# EAGLE board Schematics (EAGLE 9.2.2)
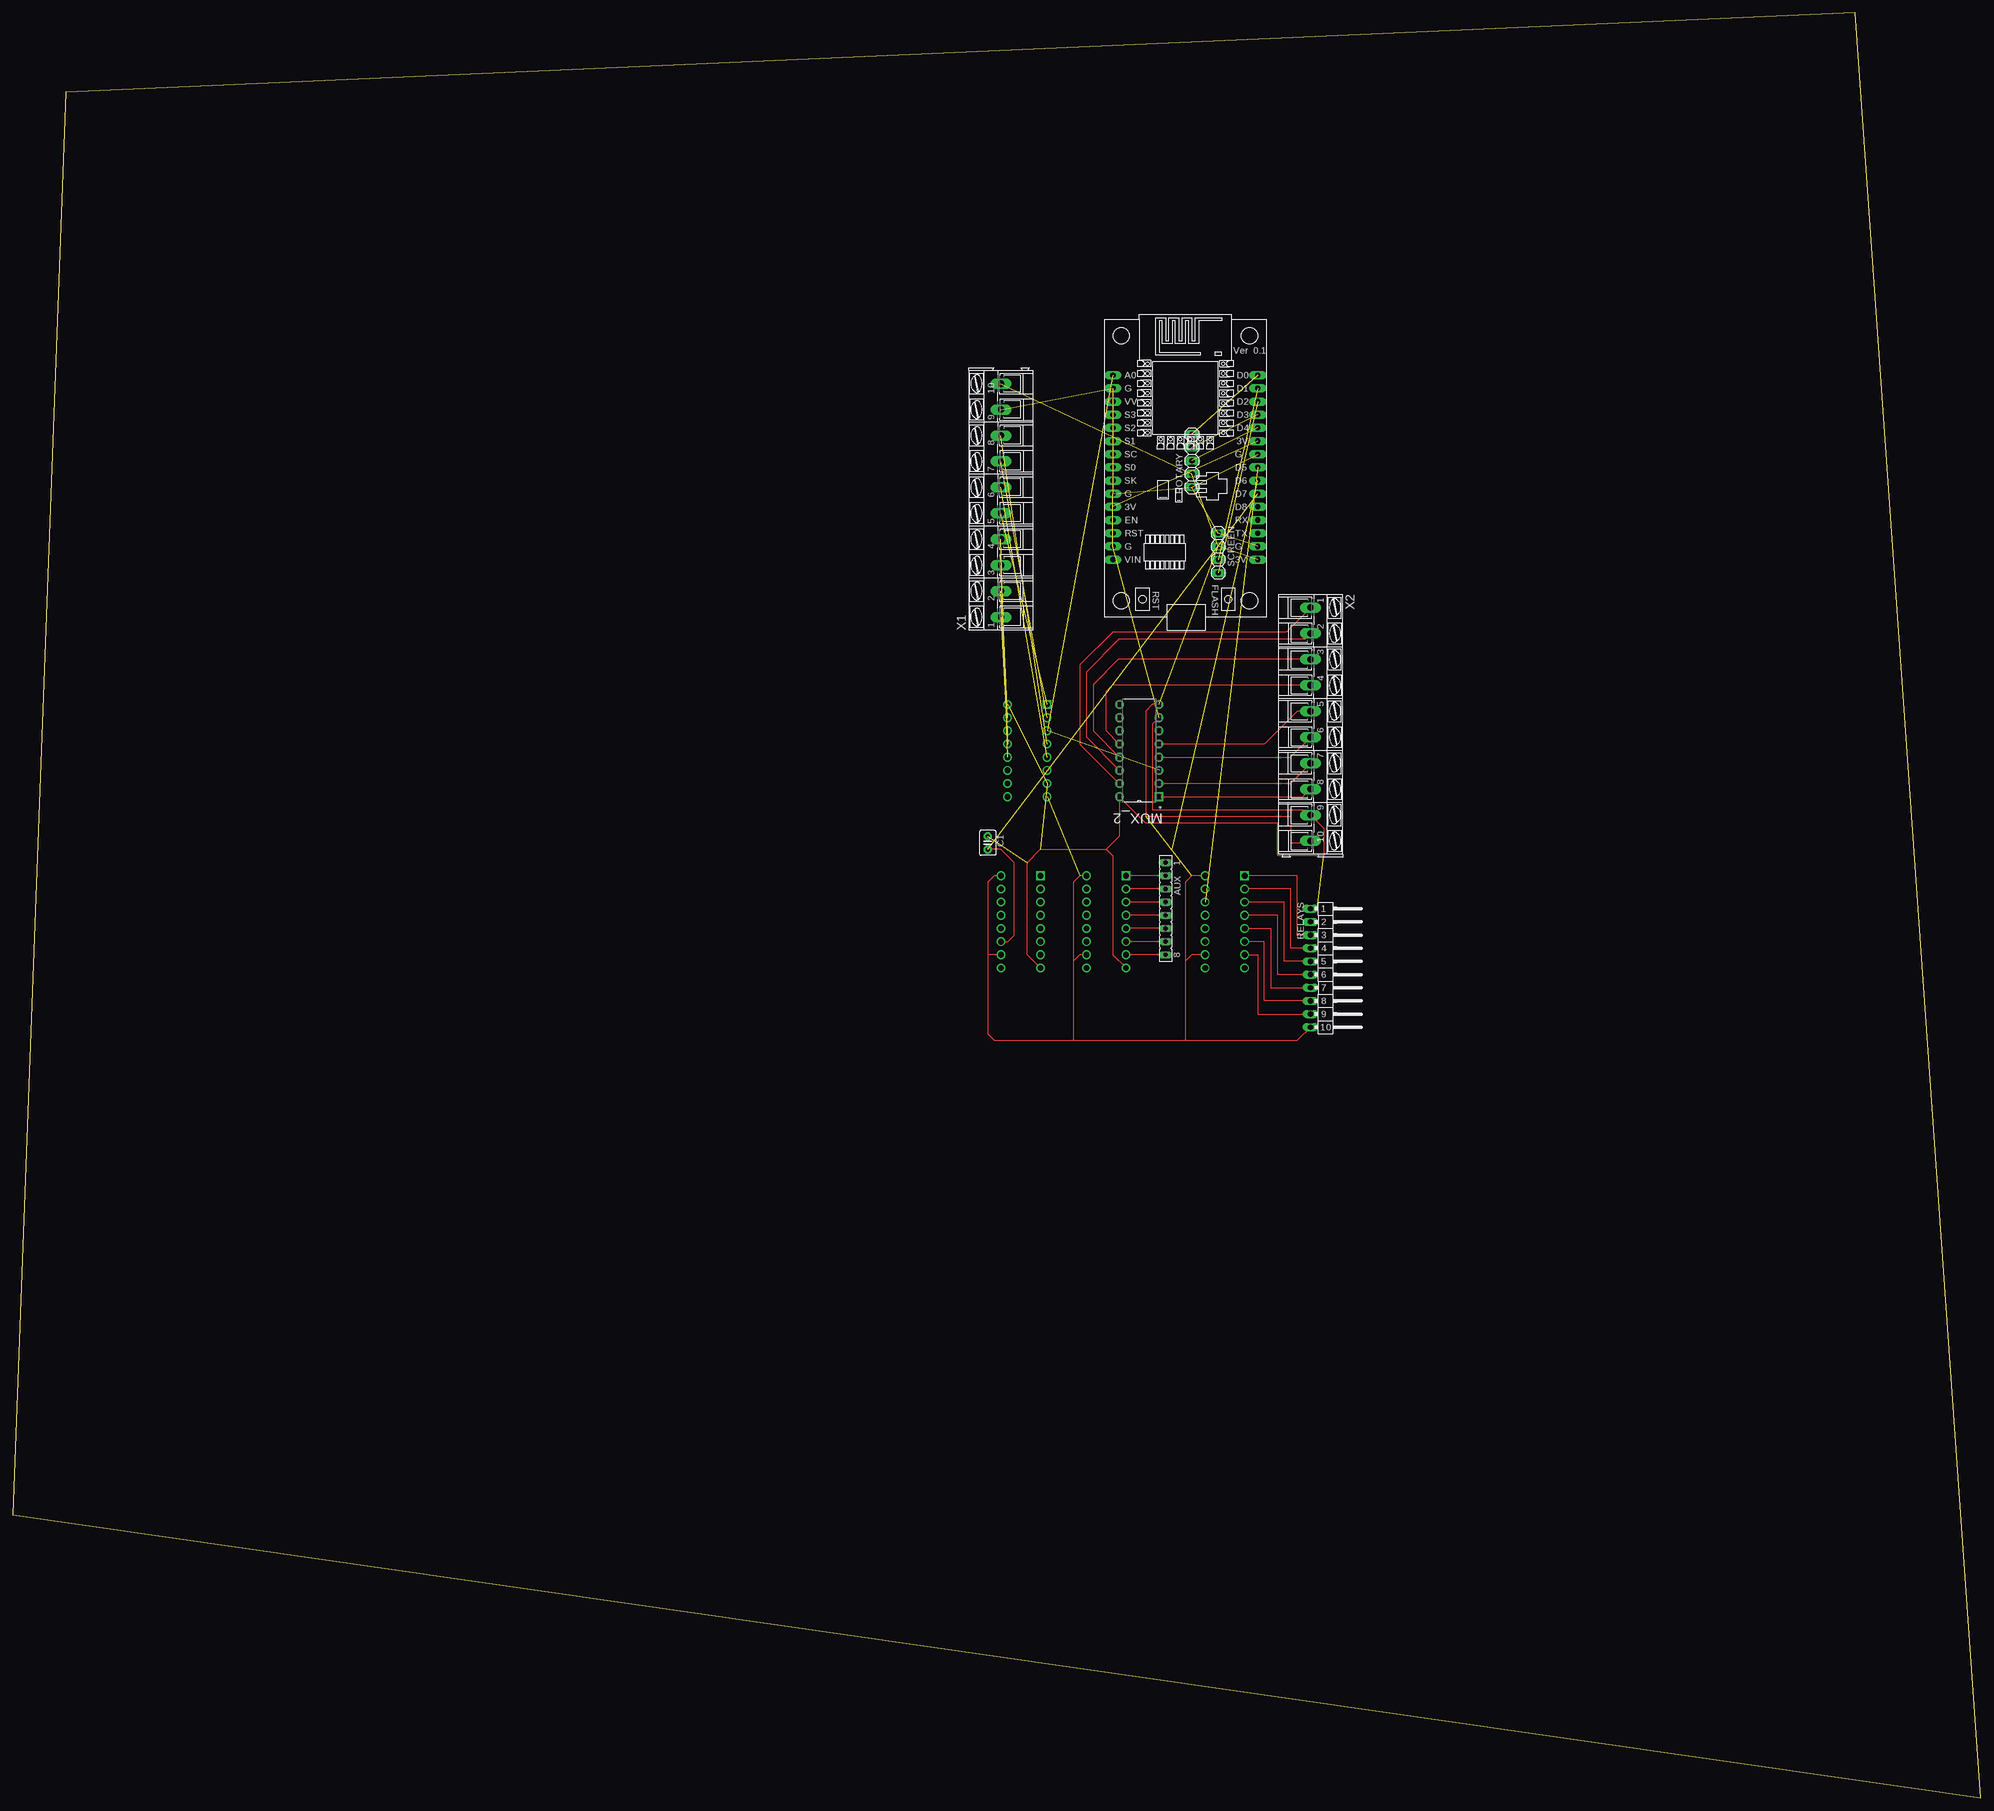
[diagram p0: board, top side]
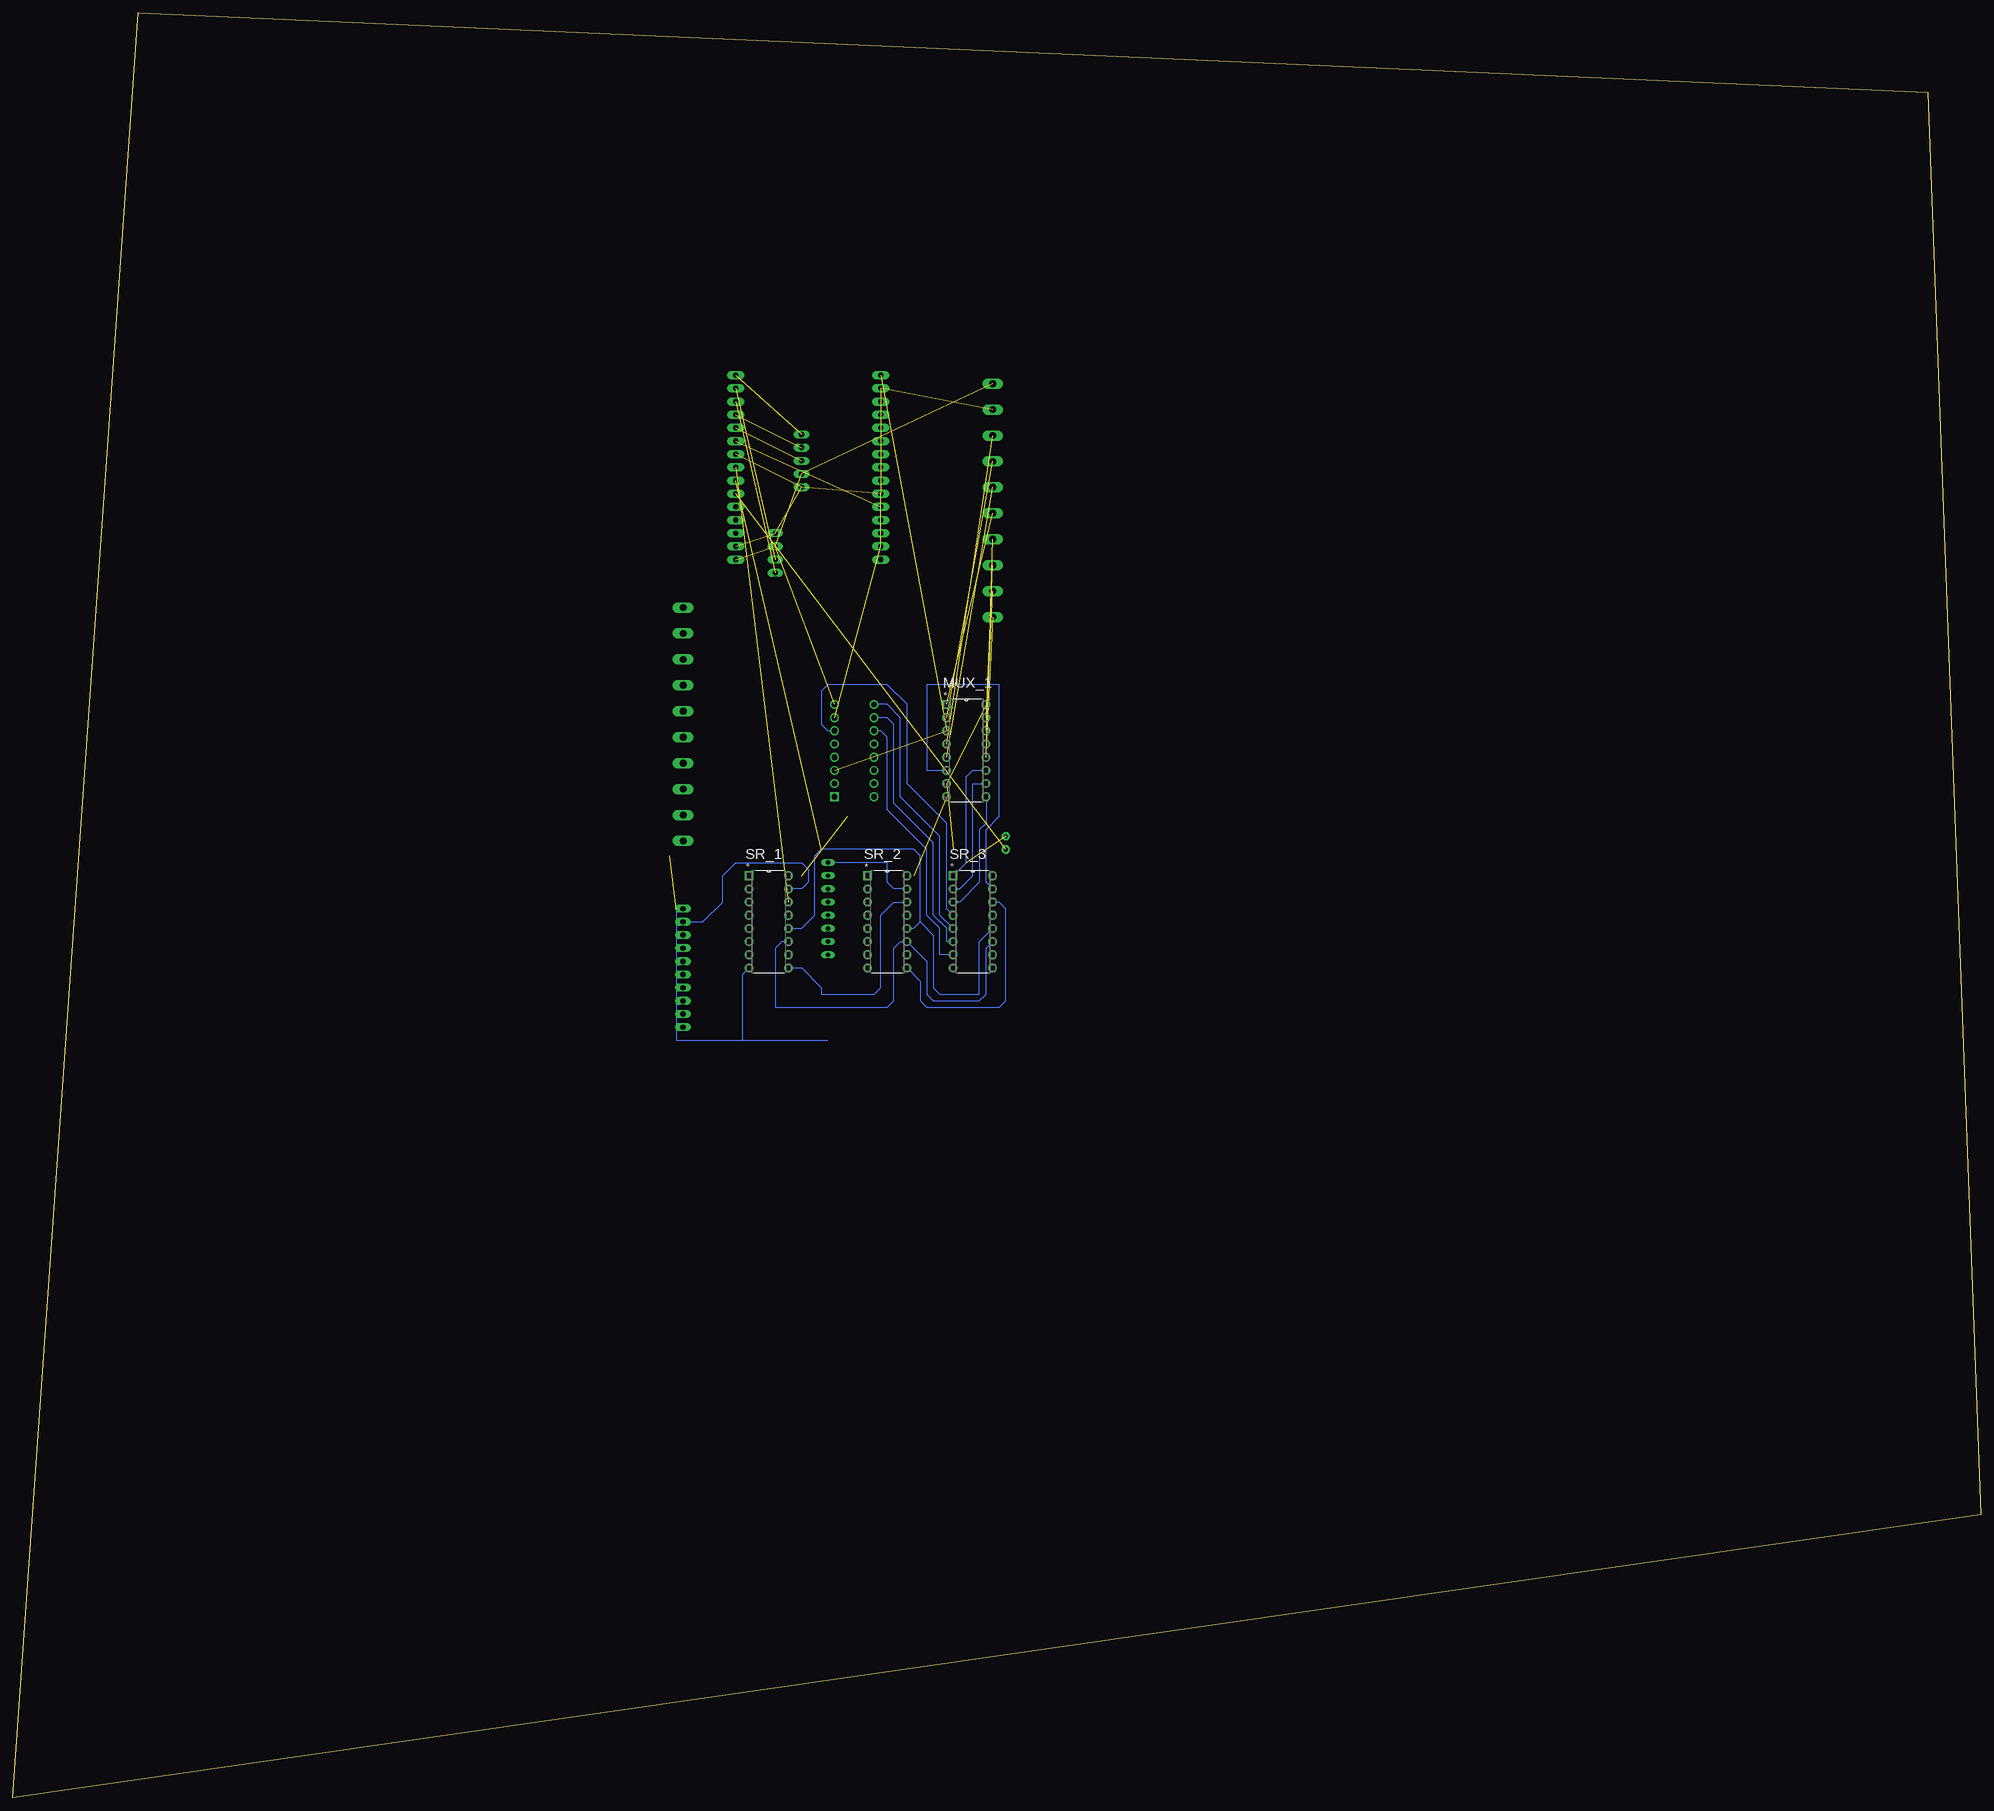
[diagram p1: board, bottom side, seen from below]

Size 379.4 x 344.16 mm. Coordinates in mm from the lower left corner, seen from the top.
Outline: 0,54.61 379.4,0 355.27,344.16 10.16,328.92 0,54.61
Copper layers (1*16): Top 0.035mm / dielectric 1.5mm / Bottom 0.035mm
Design rules "default": minimum track width 6mil, minimum drill 0.35mm, track to track 6mil, track to pad 6mil, pad to pad 6mil, via to via 6mil, smd to smd 6mil, copper to edge 40mil, drill to drill 6mil, minimum pad ring 10mil, minimum via ring 8mil, stop-mask expansion 4mil, vias tented up to drill 0mil, thermal gap 10mil

## Footprints (pad centres in the part's own frame; a part is rotated, then mirrored left to right if it is on the bottom)
FE08 = drill 0.813 long: 1 -8.89,0; 2 -6.35,0; 3 -3.81,0; 4 -1.27,0; 5 1.27,0; 6 3.81,0; 7 6.35,0; 8 8.89,0
C2.5-3 = drill 0.813 pad 1.6 octagon: 1 -1.27,0; 2 1.27,0
DIP254P762X508-16 = drill 1.118 square: 1 -7.62,17.78 | drill 1.118: 2 -7.62,15.24; 3 -7.62,12.7; 4 -7.62,10.16; 5 -7.62,7.62; 6 -7.62,5.08; 7 -7.62,2.54; 8 -7.62,0; 9 0,0; 10 0,2.54; 11 0,5.08; 12 0,7.62; 13 0,10.16; 14 0,12.7; 15 0,15.24; 16 0,17.78
MA10-1W = drill 1.016 long: 1 -11.43,0; 2 -8.89,0; 3 -6.35,0; 4 -3.81,0; 5 -1.27,0; 6 1.27,0; 7 3.81,0; 8 6.35,0; 9 8.89,0; 10 11.43,0
1X05 = drill 1.016 long: 1 -5.08,0; 2 -2.54,0; 3 0,0; 4 2.54,0; 5 5.08,0
1X04 = drill 1.016 long: 1 -3.81,0; 2 -1.27,0; 3 1.27,0; 4 3.81,0
NODEMCU = drill 1 pad 1.676 long: 1 -13.97,17.78; 2 -13.97,15.24; 3 -13.97,12.7; 4 -13.97,10.16; 5 -13.97,7.62; 6 -13.97,5.08; 7 -13.97,2.54; 8 -13.97,0; 9 -13.97,-2.54; 10 -13.97,-5.08; 11 -13.97,-7.62; 12 -13.97,-10.16; 13 -13.97,-12.7; 14 -13.97,-15.24; 15 -13.97,-17.78; 16 13.97,-17.78; 17 13.97,-15.24; 18 13.97,-12.7; 19 13.97,-10.16; 20 13.97,-7.62; 21 13.97,-5.08; 22 13.97,-2.54; 23 13.97,0; 24 13.97,2.54; 25 13.97,5.08; 26 13.97,7.62; 27 13.97,10.16; 28 13.97,12.7; 29 13.97,15.24; 30 13.97,17.78
AK300/10 = drill 1.321 long: 1 -22.504,0; 2 -17.501,0; 3 -12.497,0; 4 -7.493,0; 5 -2.515,0; 6 2.489,0; 7 7.493,0; 8 12.497,0; 9 17.501,0; 10 22.504,0

## Placement (x,y rotation side)
AUX  [FE08]  222.25,171.45 270 top
C1  10µF  [C2.5-3]  187.96,184.15 270 top
MUX_1  CD4051BE  [DIP254P762X508-16]  191.77,193.04 0 bottom
MUX_2  CD4051BE  [DIP254P762X508-16]  213.36,210.82 180 top
RELAYS  [MA10-1W]  250.19,160.02 270 top
ROTARY  [1X05]  227.33,257.81 90 top
SCREEN  [1X04]  232.41,240.03 270 top
SR_1  SN74HC595N  [DIP254P762X508-16]  229.87,160.02 0 bottom
SR_2  SN74HC595N  [DIP254P762X508-16]  207.01,160.02 0 bottom
SR_3  SN74HC595N  [DIP254P762X508-16]  190.5,160.02 0 bottom
U$1  NODEMCU  [NODEMCU]  226.06,256.54 0 top
X1  Boutons  [AK300/10]  190.5,250.19 90 top
X2  Potentiometres  [AK300/10]  250.19,207.01 270 top

## Library data of the parts
AUX = con-lsta; OC_FARNELL: unknown; OC_NEWARK: unknown
C1 = capacitor-wima
MUX_1 MUX_2 = CD4051BEE4; MPN: CD4051BE; OC_FARNELL: 2135100; OC_NEWARK: 60K5119; PACKAGE: PDIP-16; SUPPLIER: Texas Instruments
RELAYS = con-lstb; OC_FARNELL: unknown; OC_NEWARK: unknown
ROTARY SCREEN = pinhead
SR_1-SR_3 = 74hc595; MPN: SN74HC595N; OC_FARNELL: 9591664; OC_NEWARK: 60K6845; PACKAGE: PDIP-16; SUPPLIER: Texas Instruments
U$1 = nodemcu
X1 X2 = con-ptr500; OC_FARNELL: unknown; OC_NEWARK: unknown

## Nets
3V: U$1.11 U$1.25
GND: C1.1 MUX_1.7 MUX_1.16 MUX_2.7 MUX_2.16 RELAYS.1 ROTARY.1 SCREEN.1 SR_1.8 SR_2.8 SR_3.8 U$1.2 U$1.10 U$1.14 U$1.17 U$1.24 X1.9 X2.9
N$1: RELAYS.2 SR_1.15
N$2: SR_1.14 U$1.23
N$3: SR_1.12 SR_2.12 SR_3.12 U$1.22
N$4: SR_2.9 SR_3.14
N$5: C1.2 SR_1.11 SR_2.11 SR_3.11 U$1.21
N$6: RELAYS.3 SR_1.1
N$7: RELAYS.4 SR_1.2
N$8: RELAYS.5 SR_1.3
N$9: RELAYS.6 SR_1.4
N$10: RELAYS.7 SR_1.5
N$11: RELAYS.8 SR_1.6
N$12: RELAYS.9 SR_1.7
N$13: MUX_1.13 X1.1
N$14: MUX_1.14 X1.2
N$15: SR_1.9 SR_2.14
N$16: MUX_1.15 X1.3
N$17: MUX_1.12 X1.4
N$18: MUX_1.1 X1.5
N$19: MUX_1.5 X1.6
N$20: MUX_1.2 X1.7
N$21: MUX_1.4 X1.8
N$22: MUX_2.1 X2.8
N$23: MUX_2.2 X2.7
N$24: MUX_1.6 SR_3.15
N$25: MUX_1.11 SR_3.1
N$26: MUX_1.10 SR_3.2
N$27: MUX_1.9 SR_3.3
N$28: MUX_2.6 SR_3.4
N$29: MUX_2.9 SR_3.5
N$30: MUX_2.10 SR_3.6
N$31: MUX_2.11 SR_3.7
N$32: MUX_1.3 MUX_2.3 U$1.1
N$33: MUX_2.4 X2.6
N$34: MUX_2.5 X2.5
N$35: MUX_2.12 X2.4
N$36: MUX_2.15 X2.1
N$37: MUX_2.14 X2.2
N$38: MUX_2.13 X2.3
N$39: AUX.1 SR_2.15
N$40: AUX.2 SR_2.1
N$41: AUX.3 SR_2.2
N$42: AUX.4 SR_2.3
N$43: AUX.5 SR_2.4
N$44: AUX.6 SR_2.5
N$45: AUX.7 SR_2.6
N$46: AUX.8 SR_2.7
N$48: ROTARY.3 U$1.26
N$49: ROTARY.5 U$1.30
N$50: ROTARY.4 U$1.27
N$51: SCREEN.4 U$1.28
N$52: SCREEN.3 U$1.29
VCC: MUX_1.8 MUX_2.8 RELAYS.10 ROTARY.2 SCREEN.2 SR_1.10 SR_1.16 SR_2.10 SR_2.16 SR_3.10 SR_3.16 U$1.16 X1.10 X2.10

## Tracks (layer width: path | path; a pad name or v marks a point on that pad's centre or on a via)
3V  (1 unrouted)
GND  (12 unrouted)
  Top 0.152: SR_3.8 195.58,162.56 195.58,180.34 198.12,182.88 210.82,182.88 | 210.82,182.88 212.09,181.61 212.09,162.56 SR_2.8 | MUX_2.7 219.71,207.01 219.71,190.5 249.2,190.5 X2.9 252.73,186.97 252.73,181.61 243.84,181.61 243.84,187.96 218.44,187.96 MUX_2.16 213.36,185.42 210.82,182.88
  Bottom 0.152: 238.76,146.05 222.25,146.05 | SR_1.8 238.76,158.75 238.76,146.05 | RELAYS.1 251.46,171.45 251.46,146.05 238.76,146.05
N$1
  Bottom 0.152: RELAYS.2 246.38,168.91 242.57,172.72 242.57,177.8 240.03,180.34 227.33,180.34 226.06,179.07 226.06,176.53 227.33,175.26 SR_1.15
N$2  (1 unrouted)
N$3  (1 unrouted)
  Bottom 0.152: SR_1.12 227.33,167.64 224.79,170.18 224.79,181.61 223.52,182.88 205.74,182.88 204.47,181.61 204.47,168.91 | SR_2.12 205.74,167.64 204.47,168.91 | 204.47,168.91 201.93,166.37 201.93,156.21 200.66,154.94 193.04,154.94 193.04,165.1 SR_3.12
N$4
  Bottom 0.152: SR_2.9 204.47,157.48 204.47,153.67 203.2,152.4 189.23,152.4 187.96,153.67 187.96,171.45 189.23,172.72 SR_3.14
N$5  (1 unrouted)
  Top 0.152: SR_3.11 191.77,165.1 193.04,166.37 193.04,180.34 190.5,182.88 C1.2
  Bottom 0.152: SR_1.11 231.14,165.1 232.41,163.83 232.41,152.4 210.82,152.4 209.55,153.67 209.55,163.83 208.28,165.1 SR_2.11 203.2,161.29 203.2,154.94 201.93,153.67 193.04,153.67 191.77,154.94 191.77,163.83 SR_3.11
N$6
  Top 0.152: RELAYS.3 247.65,166.37 247.65,177.8 SR_1.1
N$7
  Top 0.152: RELAYS.4 246.38,163.83 246.38,175.26 SR_1.2
N$8
  Top 0.152: RELAYS.5 245.11,161.29 245.11,172.72 SR_1.3
N$9
  Top 0.152: RELAYS.6 243.84,158.75 243.84,170.18 SR_1.4
N$10
  Top 0.152: SR_1.5 242.57,167.64 242.57,156.21 RELAYS.7
N$11
  Top 0.152: RELAYS.8 241.3,153.67 241.3,165.1 SR_1.6
N$12
  Top 0.152: 248.92,151.13 RELAYS.9 240.03,151.13 240.03,162.56 SR_1.7
N$13  (1 unrouted)
N$14  (1 unrouted)
N$15
  Bottom 0.152: SR_1.9 227.33,160.02 223.52,156.21 223.52,154.94 213.36,154.94 212.09,156.21 212.09,170.18 209.55,172.72 SR_2.14
N$16  (1 unrouted)
N$17  (1 unrouted)
N$18  (1 unrouted)
N$19  (1 unrouted)
N$20  (1 unrouted)
N$21  (1 unrouted)
N$22
  Top 0.152: MUX_2.1 248.72,193.04 X2.8
N$23
  Top 0.152: X2.7 246.25,195.58 MUX_2.2
N$24
  Bottom 0.152: SR_3.15 191.77,176.53 191.77,186.69 189.23,189.23 189.23,214.63 203.2,214.63 203.2,198.12 MUX_1.6
N$25
  Bottom 0.152: SR_3.1 195.58,180.34 195.58,196.85 194.31,198.12 MUX_1.11
N$26
  Bottom 0.152: SR_3.2 196.85,175.26 194.31,177.8 194.31,195.58 MUX_1.10
N$27
  Bottom 0.152: MUX_1.9 191.77,187.96 193.04,186.69 193.04,176.53 196.85,172.72 SR_3.3
N$28
  Bottom 0.152: SR_3.4 199.39,171.45 199.39,187.96 207.01,195.58 207.01,210.82 210.82,214.63 222.25,214.63 223.52,213.36 223.52,207.01 222.25,205.74 MUX_2.6
N$29
  Bottom 0.152: SR_3.5 200.66,170.18 200.66,185.42 208.28,193.04 208.28,208.28 210.82,210.82 MUX_2.9
N$30
  Bottom 0.152: SR_3.6 199.39,165.1 199.39,167.64 201.93,170.18 201.93,184.15 209.55,191.77 209.55,207.01 210.82,208.28 MUX_2.10
N$31
  Bottom 0.152: SR_3.7 200.66,162.56 200.66,167.64 203.2,170.18 203.2,182.88 210.82,190.5 210.82,204.47 212.09,205.74 MUX_2.11
N$32  (2 unrouted)
N$33
  Top 0.152: MUX_2.4 246.33,200.66 X2.6
N$34
  Top 0.152: X2.5 247.62,209.52 241.3,203.2 MUX_2.5
N$35
  Top 0.152: MUX_2.12 210.82,205.74 210.82,213.36 212.09,214.63 250.06,214.63 X2.4
N$36
  Top 0.152: X2.1 245.47,224.79 212.09,224.79 205.74,218.44 205.74,203.2 MUX_2.15
N$37
  Top 0.152: MUX_2.14 207.01,204.47 207.01,217.17 213.36,223.52 249.2,223.52 X2.2
N$38
  Top 0.152: X2.3 213.16,219.51 208.28,214.63 208.28,205.74 MUX_2.13
N$39
  Bottom 0.152: SR_2.15 209.55,175.26 210.19,175.89 210.82,176.53 210.82,180.34 AUX.1
N$40
  Top 0.152: AUX.2 SR_2.1
N$41
  Top 0.152: AUX.3 SR_2.2
N$42
  Top 0.152: AUX.4 SR_2.3
N$43
  Top 0.152: AUX.5 SR_2.4
N$44
  Top 0.152: AUX.6 SR_2.5
N$45
  Top 0.152: AUX.7 SR_2.6
N$46
  Top 0.152: AUX.8 SR_2.7
N$48  (1 unrouted)
N$49  (1 unrouted)
N$50  (1 unrouted)
N$51  (1 unrouted)
N$52  (1 unrouted)
VCC  (6 unrouted)
  Top 0.152: SR_3.16 189.23,177.8 187.96,176.53 187.96,162.56 | 187.96,162.56 187.96,147.32 189.23,146.05 204.47,146.05 | 204.47,146.05 226.06,146.05 | 226.06,146.05 247.65,146.05 RELAYS.10 | SR_3.10 187.96,162.56 | SR_2.10 205.74,162.56 204.47,161.29 | 204.47,161.29 204.47,146.05 | SR_2.16 205.74,177.8 204.47,176.53 204.47,161.29 | SR_1.10 227.33,162.56 226.06,161.29 | 226.06,161.29 226.06,146.05 | SR_1.16 227.33,177.8 226.06,176.53 226.06,161.29 | MUX_2.8 219.71,210.82 218.44,209.55 218.44,189.23 246.38,189.23 246.38,184.15 249.83,184.15 X2.10